# Altium PCB Board.PcbDoc
Units mil, origin at the board's own origin, x right, y up, seen from the top; angles counter-clockwise.
Board outline 2350 x 2400 mil, 2 copper layers (Top Layer, Bottom Layer); 48 components, 52 nets, 195 pads, 30 vias.
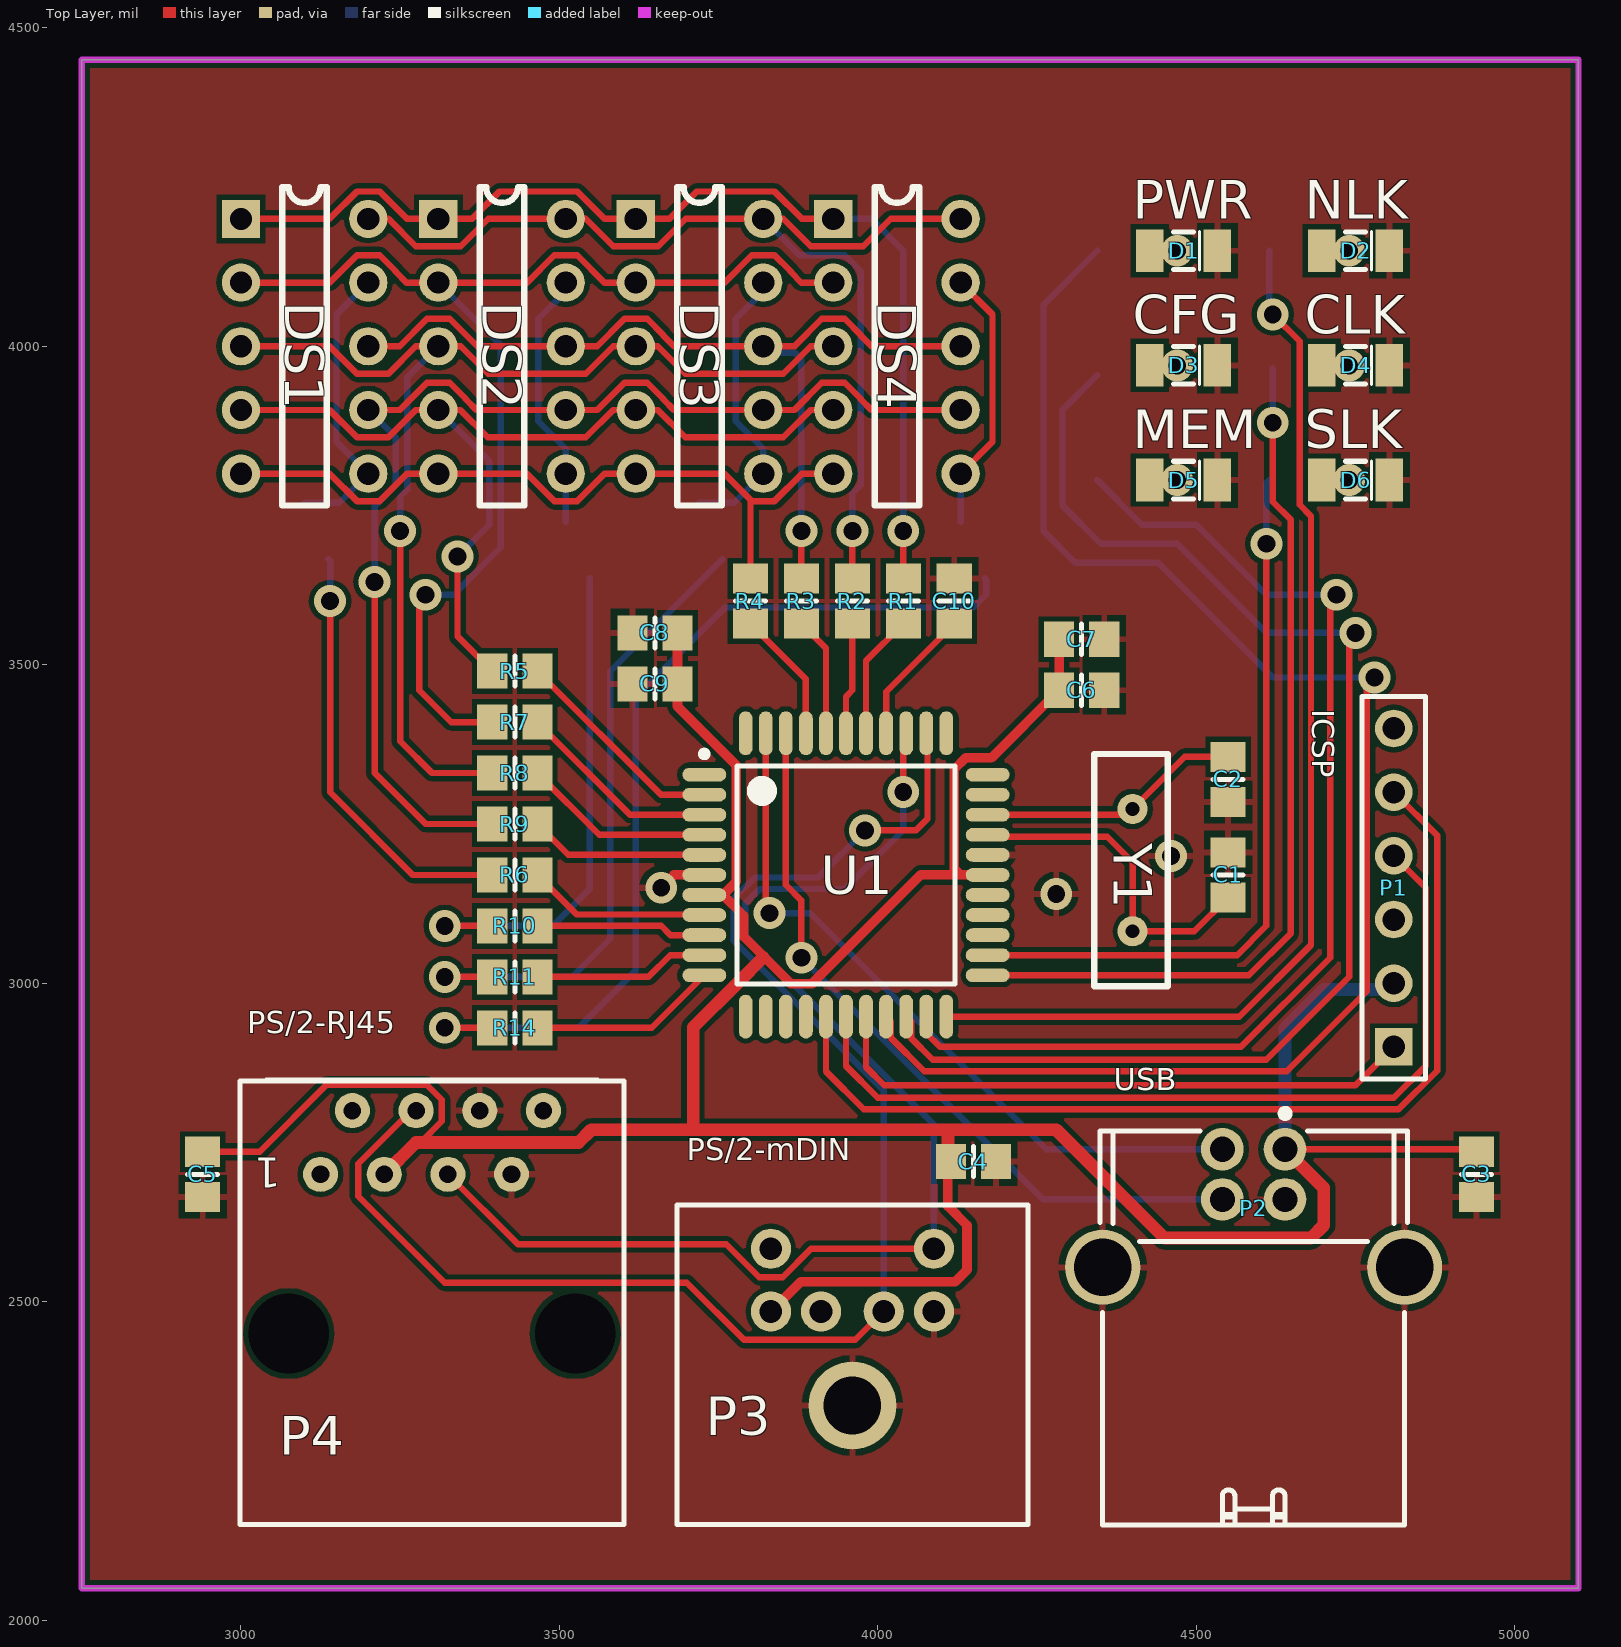
[diagram p0: Top Layer view]
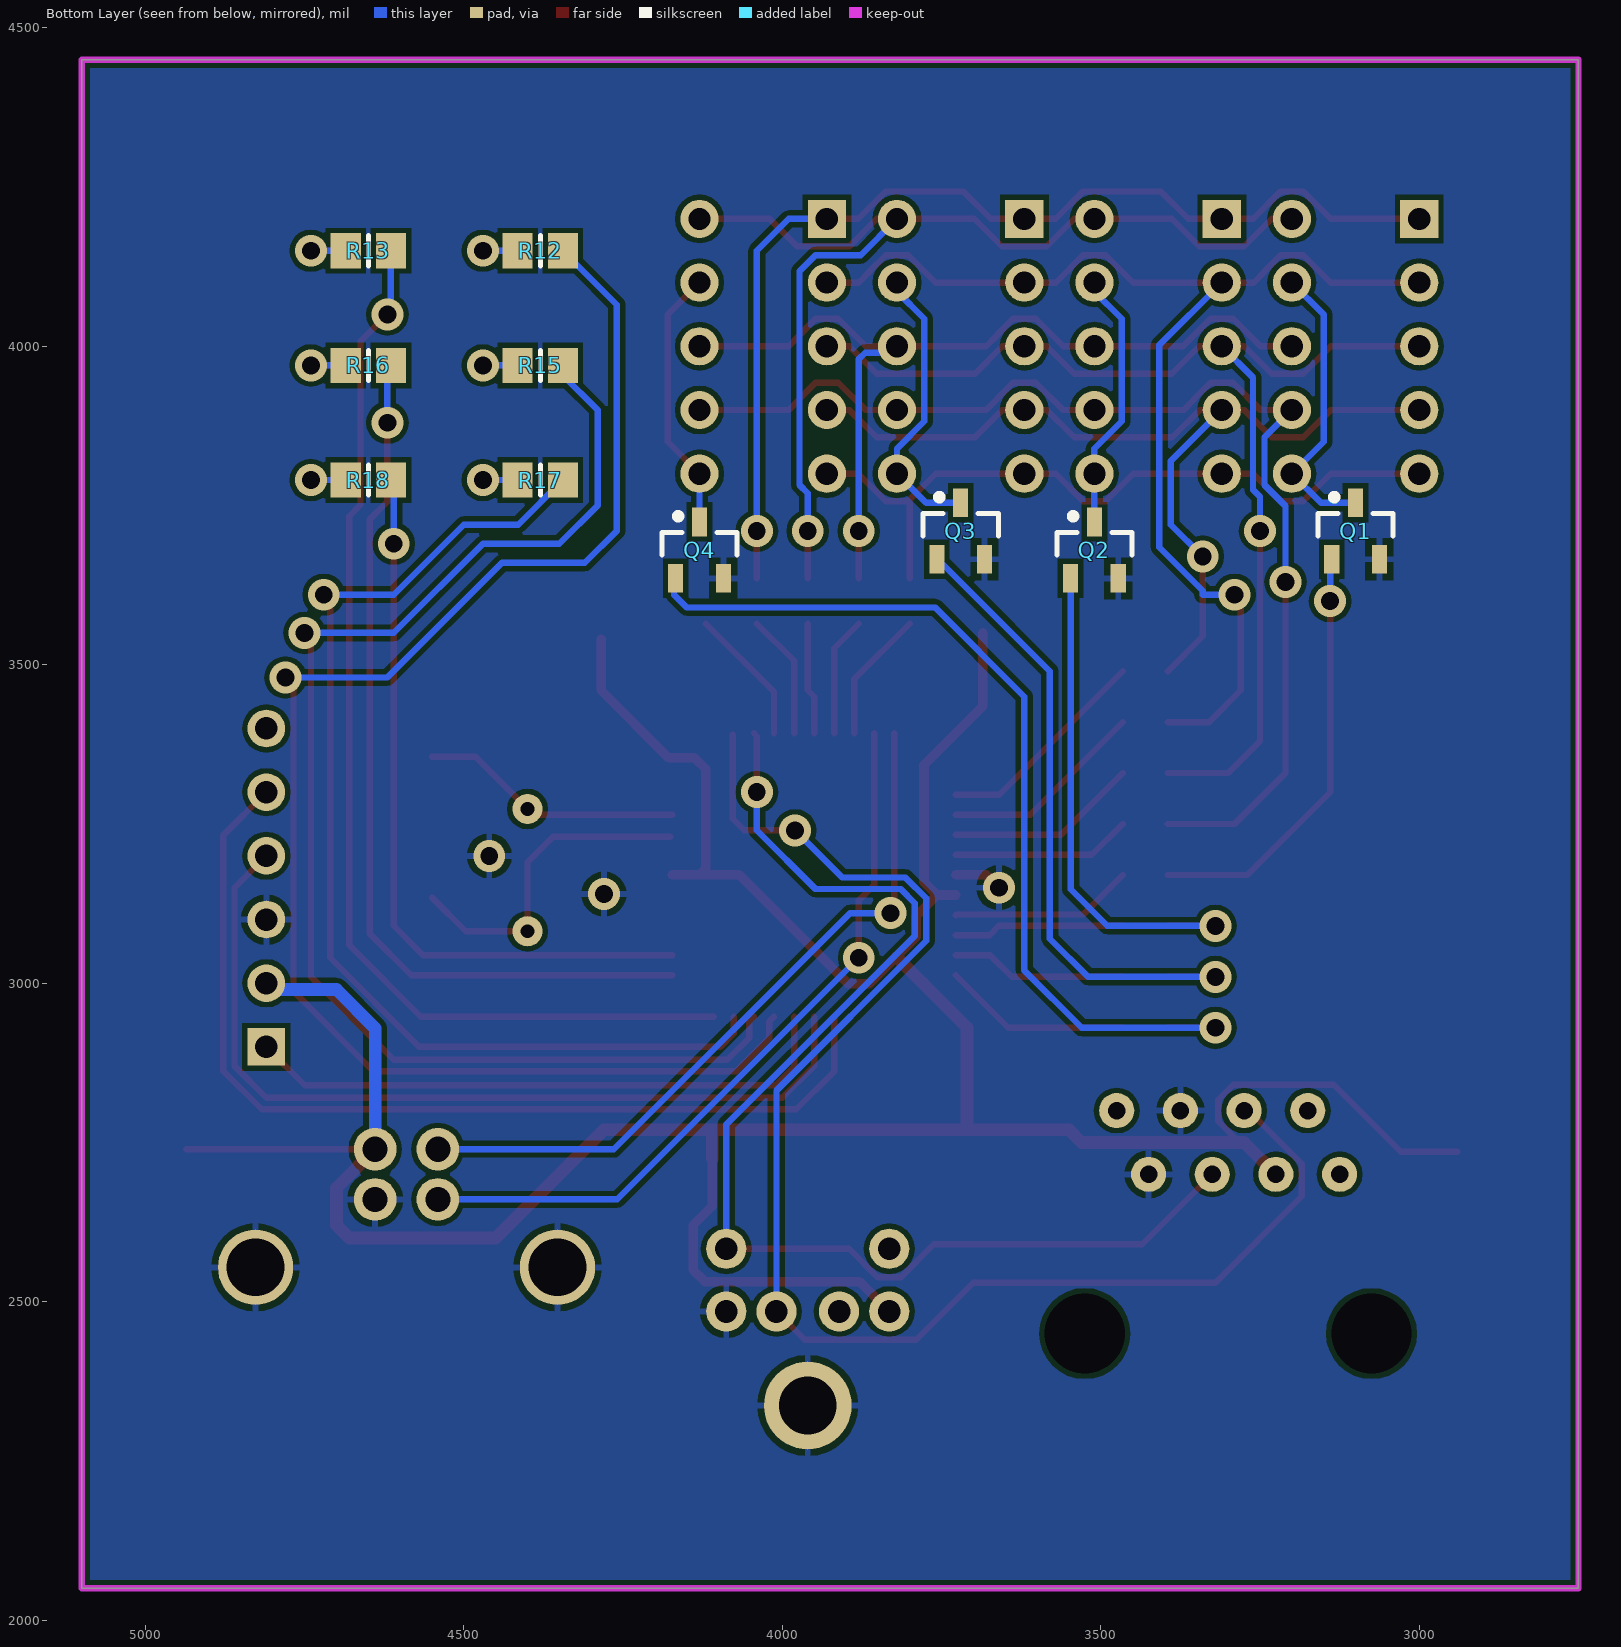
[diagram p1: Bottom Layer view, seen from below]

## Layer stack, top to bottom
Top Solder: solder mask 0.4, Solder Resist, Dk 3.5
Top Layer: signal copper 1.4
Dielectric 1: dielectric 12.6, FR-4, Dk 4.8
Bottom Layer: signal copper 1.4
Bottom Solder: solder mask 0.4, Solder Resist, Dk 3.5

## Board outline
2750,2050 2750,4450 5100,4450 5100,2050

## Design rules (kind name [scope] priority, off if disabled: settings)
Clearance [All] p1: gap=8
HoleSize [All] p1: absolutevalues=TRUE maxlimit=200 minlimit=1 maxpercent=80.000 minpercent=20.000
MinimumSolderMaskSliver [All] p1: minsoldermaskwidth=2
PolygonConnect [All] p1: connectstyle=Relief reliefconductorwidth=10 reliefentries=4 polygonreliefangle="90 Angle" airgapwidth=10
RoutingVias [All] p1: holewidth=28 width=50 viastyle="Through Hole" minholewidth=28 minwidth=50 maxholewidth=28 maxwidth=50
SilkToSilkClearance [All] p1: silktosilkclearance=0
SilkToSolderMaskClearance [IsPad] p1: minsilkscreentomaskgap=2 clearancetoexposedcopper=TRUE
SolderMaskExpansion [All] p1: expansion=3
Width [All] p1: maxlimit=20 minlimit=10 preferedwidth=10
25 further rules are at their usual default settings.

## Components (designator, comment, footprint, x,y, rotation, side; value= is the part's Value field where it differs from the comment)
C1 "CAP" 0805 4550,3170 r90 top
C2 "CAP" 0805 4550,3320 r270 top
C3 "CAP" 0805 4940,2700 r90 top
C4 "CAP" 0805 4150,2720 r180 top
C5 "CAP" 0805 2940,2700 r90 top
C6 "CAP" 0805 4320,3460 r180 top
C7 "CAP" 0805 4320,3540 r180 top
C8 "CAP" 0805 3650,3550 r0 top
C9 "CAP" 0805 3650,3470 r0 top
C10 "CAP" 0805 4120,3600 r270 top
D1 "PWR (BLU)" 1206P 4480,4150 r180 top
D2 "NUMLK (GRN)" 1206P 4750,4150 r180 top
D3 "CFG (YLW)" 1206P 4480,3970 r180 top
D4 "CAPSLK (GRN)" 1206P 4750,3970 r180 top
D5 "MEM (RED)" 1206P 4480,3790 r180 top
D6 "SCRLLK (GRN)" 1206P 4750,3790 r180 top
DS1 "DISPLAY 1" 7SEG 3000,4200 r0 top
DS2 "DISPLAY 2" 7SEG 3310,4200 r0 top
DS3 "DISPLAY 3" 7SEG 3620,4200 r0 top
DS4 "DISPLAY 4" 7SEG 3930,4200 r0 top
P1 "ICSP" HDR1X6 4810,2900 r90 top
P2 "USB" TYCO_292304-1 4590,2700 r0 top
P3 "PS/2 MiniDIN-6" PS2-6PIN 3960,2150 r180 top
P4 "PS/2 8P8C" FCI_54602-908LF 3300,2750 r180 top
Q1 "MMBT2222A" SOT-23 3100,3710 r90 bottom
Q2 "MMBT2222A" SOT-23 3510,3680 r90 bottom
Q3 "MMBT2222A" SOT-23 3720,3710 r90 bottom
Q4 "MMBT2222A" SOT-23 4130,3680 r90 bottom
R1 "RES" 0805 4040,3600 r90 top
R2 "RES" 0805 3960,3600 r90 top
R3 "RES" 0805 3880,3600 r90 top
R4 "RES" 0805 3800,3600 r90 top
R5 "RES" 0805 3430,3490 r180 top
R6 "RES" 0805 3430,3170 r180 top
R7 "RES" 0805 3430,3410 r180 top
R8 "RES" 0805 3430,3330 r180 top
R9 "RES" 0805 3430,3250 r180 top
R10 "RES" 0805 3430,3090 r180 top
R11 "RES" 0805 3430,3010 r180 top
R12 "RES" 0805 4380,4150 r0 bottom
R13 "RES" 0805 4650,4150 r0 bottom
R14 "RES" 0805 3430,2930 r180 top
R15 "RES" 0805 4380,3970 r0 bottom
R16 "RES" 0805 4650,3970 r0 bottom
R17 "RES" 0805 4380,3790 r0 bottom
R18 "RES" 0805 4650,3790 r0 bottom
U1 "PIC18F4550-I/PT" TQFP-PT44_N 3950,3170 r0 top
Y1 "XTAL" HC49 4400,3180 r270 top

## Footprints (in the part's own frame and the unit in brackets; to place one, negate y for a bottom-side part, rotate by r counter-clockwise, add the part's x,y. Pads: shape width x height; smd on the part's side, far side on the other; paste and mask are expansions set on the pad)
7SEG [mil]
  rect 60x60 hole 35: 1(0,0)
  round 60 hole 35: 2(0,-100) 3(0,-200) 4(0,-300) 5(0,-400) 6(200,-400) 7(200,-300) 8(200,-200) 9(200,-100) 10(200,0)
  silkscreen extent 65,-450 135,50, body extent -50,-450 249,50, height 297
0805 [mm] "0805 Component"
  rect 1.2x1.4 smd: 1(-0.9,0) 2(0.9,0)
  silkscreen extent 0,-0.6 0,0.6, body extent -1.07,-0.7 1.07,0.7, height 0.7
1206P [mm] "1206 Polar Component"
  rect 1.1x1.7 smd: 1(-1.35,0) 2(1.35,0)
  silkscreen extent -0.64,-0.76 0.4,0.76, body extent -1.7,-0.9 1.7,0.9, height 1.3
FCI_54602-908LF [mm] "1 Port, 8 Positions, CAT3 RJ45 Horizontal Modular Jack"
  round 1.4 hole 0.7: 1(4.445,1.27) 2(3.175,-1.27) 3(1.905,1.27) 4(0.635,-1.27) 5(-0.635,1.27) 6(-1.905,-1.27) 7(-3.171,1.27) 8(-4.445,-1.27)
  round 1 hole 3.2 unplated mask+1.1: M1(-5.715,7.62) M2(5.715,7.62)
  silkscreen extent -7.65,-2.5 7.65,15.24, body extent -7.65,-2.5 7.65,15.24, height 12.7
HC49 [mm] "HC49 Crystal"
  round 1.2 hole 0.555: 1(-2.38,0) 2(2.5,0)
  silkscreen extent -4.57,-1.52 4.7,1.4, body extent -4.95,-1.91 5.08,1.78, height 2.54
HDR1X6 [mm] "Connector; Header; 6 Position"
  rect 1.5x1.5 hole 0.9: 1(0,0)
  round 1.5 hole 0.9: 2(2.54,0) 3(5.08,0) 4(7.62,0) 5(10.16,0) 6(12.7,0)
  silkscreen extent -1.27,-1.27 13.97,1.27
PS2-6PIN [mm] "PS2 Socket, 6 Pin, Through Hole"
  round 1.6 hole 0.9: 1(-1.25,-8.5) 2(1.25,-8.5) 3(-3.25,-8.5) 4(3.25,-8.5) 5(-3.25,-11) 6(3.25,-11)
  round 3.5 hole 2.3: S(0,-4.75)
  silkscreen extent -7,-12.75 7,0
SOT-23 [mm] "SOT-23 Component"
  rect 1.15x0.6 smd: 1(-1.125,0.95) 2(1.125,0) 3(-1.125,-0.95)
  silkscreen extent -0.2,-1.5 1.47,1.5, body extent -0.7,-1.5 0.7,1.5, height 1.1
TQFP-PT44_N [mm] "Thin QFP, 44-Leads, Body 10x10mm, Pitch 0.8mm, IPC Medium Density"
  oval 1.75x0.55 smd: 1(-5.65,4) 2(-5.65,3.2) 3(-5.65,2.4) 4(-5.65,1.6) 5(-5.65,0.8) 6(-5.65,0) 7(-5.65,-0.8) 8(-5.65,-1.6) 9(-5.65,-2.4) 10(-5.65,-3.2) 11(-5.65,-4) 23(5.65,-4) 24(5.65,-3.2) 25(5.65,-2.4) 26(5.65,-1.6) 27(5.65,-0.8) 28(5.65,0) 29(5.65,0.8) 30(5.65,1.6) 31(5.65,2.4) 32(5.65,3.2) 33(5.65,4)
  oval 0.55x1.75 smd: 12(-4,-5.65) 13(-3.2,-5.65) 14(-2.4,-5.65) 15(-1.6,-5.65) 16(-0.8,-5.65) 17(0,-5.65) 18(0.8,-5.65) 19(1.6,-5.65) 20(2.4,-5.65) 21(3.2,-5.65) 22(4,-5.65) 34(4,5.65) 35(3.2,5.65) 36(2.4,5.65) 37(1.6,5.65) 38(0.8,5.65) 39(0,5.65) 40(-0.8,5.65) 41(-1.6,5.65) 42(-2.4,5.65) 43(-3.2,5.65) 44(-4,5.65)
  silkscreen extent -5.77,-4.35 4.35,4.95, body extent -5,-5 5,5, height 1.2
TYCO_292304-1 [mm] "Thru Hole, Right Angle, 4 Position, Type B, USB Receptacle"
  round 1.7 hole 1: 1(1.25,1) 2(-1.25,1) 3(-1.25,-1) 4(1.25,-1)
  round 3 hole 2.3: 5(-6.02,-3.71) 5(6.02,-3.71)
  silkscreen extent -6.13,-13.98 6.13,2.58, body extent -7.19,-13.98 7.19,1.72, height 11.5

## Part data
C1 C2 C3 C4 C5 C6 C7 C8 C9 C10: "Capacitor"
D1 D2 D3 D4 D5 D6: library part LED, "Light Emitting Diode"
DS1 DS2 DS3 DS4: library part 7SEG-CC, "7-segment Display Common Cathode"
P1: library part "Header 6", "Header, 6-Pin"
P2: library part TYCO_292304-1, "4 Pin + 1 Shield USB Receptacle"
P3: library part PS2-6PIN, "6 Pin Through Hole PS2 Socket (Kycon P/N)"
P4: library part FCI_54602-908LF, "1 Port, 8 Positions, CAT3 RJ45 Horizontal Modular Jack"
Q1 Q2 Q3 Q4: library part NPN, "Bipolar NPN Transistor"
R1 R2 R3 R4 R5 R6 R7 R8 R9 R10 R11 R12 R13 R14 R15 R16 R17 R18: "Resistor"
U1: "High Performance, Enhanced Flash, USB Microcontroller with nanoWatt Technology, 32K Flash, 44-Pin TQFP, Industrial Temperature Range"
Y1: "Crystal Oscillator"

## Via types
v1: diameter 50, hole 28, Top Layer to Bottom Layer, tented both sides, 24 vias
v2: diameter 50, hole 28, Top Layer to Bottom Layer, 6 vias

## Nets (pads, with @x,y where several pads share a name; then routed paths per layer and width w, separated by ;. In a path a pad name is that pad's centre, name@x,y a point inside that pad or via, vN(x,y) a via of type N, cw(c..) or ccw(c..) an arc to the next point about the centre after c; other vN are vias at no path point)
5V: C3.2 C4.2 C5.2 C6.2 C7.2 C8.2 C9.2 P1.2 P2.1 P3.4 P4.3 U1.7 U1.28 | length 5324.1
  Top Layer w10: C5.2 3029.31,2735.43 3134.44,2840.56 3291.8,2840.56 3315.56,2816.8 3315.56,2783.2 3282.36,2750 ; P2.1 C3.2@4936.06,2739.37
  Top Layer w15: C8.2 C9.2 3685.43,3434.57 3777.51,3342.49 3777.51,3159.1 3758.5,3140.09 3758.5,3138.5 U1.7@3756.92,3138.5 ; U1.7 U1.7@3756.92,3138.5 ; P3.4 3879.04,2531.64 4121.64,2531.64 4140,2550 4140,2620 4110,2650 C4.2@4110,2724.57 ; U1.28 4130,3170 ; C7.2 C6.2 4178.37,3353.81 4137.91,3353.81 4120,3335.89 4120,3200 4120,3180 4130,3170 ; U1.7@3756.92,3138.5 3789.5,3105.92 3789.5,3073.22 3863.22,2999.5 3896.78,2999.5 4067.28,3170 4130,3170
  Top Layer w20: P4.3 3275,2750 3282.36,2750 3530,2750 3550,2770 3710,2770 ; 3819.71,3040.29 3780.01,3000.58 3710,2930.57 3710,2770 ; C4.2@4110,2724.57 4110,2770 ; P2.1 4700,2678.58 4700,2620 4680,2600 4450,2600 4280,2770 4110,2770 ; 3710,2770 4110,2770
  Bottom Layer w20: P2.1 4639.21,2929.21 4700,2990 4800,2990 P1.2
DISP1_EN: R6.1 U1.8 | length 288.2
  Top Layer w10: R6.1 3527.43,3108 3726.57,3108 U1.8
DISP2_EN: R10.1 U1.9 | length 268.1
  Top Layer w10: R10.1 3660,3090 3674.49,3075.51 U1.9
DISP3_EN: R11.1 U1.10 | length 276.2
  Top Layer w10: R11.1 3640,3010 3674.02,3044.02 U1.10
DISP4_EN: R14.1 U1.11 | length 296.3
  Top Layer w10: R14.1 3645.04,2930 U1.11
DISP_A: R1.1 U1.38 | length 196.4
  Top Layer w10: U1.38 3981.5,3506.06 R1.1
DISP_B: R2.1 U1.39 | length 176.3
  Top Layer w10: U1.39 3950,3450 3960,3460 R2.1
DISP_C: R3.1 U1.40 | length 188.1
  Top Layer w10: R3.1 3918.5,3526.06 U1.40
DISP_D: R4.1 U1.41 | length 208.2
  Top Layer w10: R4.1 3887.01,3477.56 U1.41
DISP_DP: R9.1 U1.5 | length 282.2
  Top Layer w10: R9.1 3513.94,3201.5 U1.5
DISP_E: R5.1 U1.2 | length 342.5
  Top Layer w10: R5.1 3659.45,3295.98 U1.2
DISP_F: R7.1 U1.3 | length 322.4
  Top Layer w10: R7.1 3610.95,3264.49 U1.3
DISP_G: R8.1 U1.4 | length 302.3
  Top Layer w10: R8.1 3562.44,3232.99 U1.4
GND: C1.2 C2.2 C3.1 C4.1 C5.1 C6.1 C7.1 C8.1 C9.1 C10.1 D1.1 D2.1 D3.1 D4.1 D5.1 D6.1 P1.3 P2.4 P2.5 P3.3 P3.S P4.6 P4.7 Q1.3 Q2.3 Q3.3 Q4.3 U1.6 U1.29 | length 75.8
  Top Layer w15: v1(3660,3150) 3680,3170 U1.6
  other v1: 4280,3140 4460,3200
ICSP_PGC: P1.5 U1.16 | length 1560.9
  Top Layer w10: U1.16 3918.5,2861.5 3978,2802 4817.46,2802 4878,2862.54 4878,3232 P1.5
ICSP_PGD: P1.4 U1.17 | length 1379.7
  Top Layer w10: U1.17 3950,2870 4000,2820 4810,2820 4860,2870 4860,3150 P1.4
ICSP_VPP: P1.1 U1.18 | length 944.2
  Top Layer w10: U1.18 3981.5,2868.5 4010,2840 4750,2840 P1.1
LED_CAPSLK: R16.1 U1.23 | length 1400.8
  Top Layer w10: U1.23 4582.52,3012.52 4648,3078 4648,3728 4620,3756 v1(4620,3880)
  Bottom Layer w10: v1(4620,3880) R16.1@4620,3964.57
LED_CFG: R15.1 U1.20 | length 2112.5
  Top Layer w10: U1.20 4052.16,2939.89 4052.16,2914.07 4086.23,2880 4610,2880 4740,3010 4740,3550 v1(4750,3550)
  Bottom Layer w10: R15.1@4344.57,3954.57 4290,3900 4290,3750 4350,3690 4470,3690 4610,3550 v1(4750,3550)
LED_MEM: R17.1 U1.21 | length 1751
  Top Layer w10: U1.21 4075.98,2921.74 4097.72,2900 4570,2900 4710,3040 4710,3600 v1(4720,3610)
  Bottom Layer w10: R17.1 4414.57,3720 4500,3720 4610,3610 v1(4720,3610)
LED_NUMLK: R13.1 U1.22 | length 1736.2
  Top Layer w10: U1.22 4567.56,2947.56 4680,3060 4680,3733.35 4662.2,3751.15 4662.2,4007.8 v1(4620,4050)
  Bottom Layer w10: R13.1 4614.57,4055.43 v1(4620,4050)
LED_PWR: R12.1 U1.19 | length 2445
  Top Layer w10: U1.19 4020.66,2939.89 4020.66,2914.07 4072.73,2862 4642,2862 4767.47,2987.47 4767.47,3467.47 v1(4780,3480)
  Bottom Layer w10: R12.1 4260,4065.43 4260,3710 4310,3660 4440,3660 4620,3480 v1(4780,3480)
LED_SCRLLK: R18.1 U1.24 | length 1158.5
  Top Layer w10: U1.24 4564.02,3044.02 4610,3090 v1(4610,3690)
  Bottom Layer w10: v1(4610,3690) 4610,3785.43 R18.1
NetD1_A: D1.2 R12.2 | length 97.7
  Top Layer w10: D1.2 v2(4470,4150)
  Bottom Layer w10: R12.2 v2(4470,4150)
NetD2_A: D2.2 R13.2 | length 97.7
  Top Layer w10: D2.2 v2(4740,4150)
  Bottom Layer w10: R13.2 v2(4740,4150)
NetD3_A: D3.2 R15.2 | length 97.7
  Top Layer w10: D3.2 v2(4470,3970)
  Bottom Layer w10: R15.2 v2(4470,3970)
NetD4_A: D4.2 R16.2 | length 97.7
  Top Layer w10: D4.2 v2(4740,3970)
  Bottom Layer w10: R16.2 v2(4740,3970)
NetD5_A: D5.2 R17.2 | length 97.7
  Top Layer w10: D5.2 v2(4470,3790)
  Bottom Layer w10: R17.2 v2(4470,3790)
NetD6_A: D6.2 R18.2 | length 97.7
  Top Layer w10: D6.2 v2(4740,3790)
  Bottom Layer w10: R18.2 v2(4740,3790)
NetDS1_a: DS1.1 DS2.1 DS3.1 DS4.1 R1.2 | length 1682.1
  Top Layer w10: DS1.1 3139.19,4200 3182.19,4243 3217.81,4243 3260.81,4200 DS2.1 3362.93,4200 3405.93,4243 3527.81,4243 3570.81,4200 DS3.1 3672.93,4200 3715.93,4243 3837.81,4243 3880.81,4200 DS4.1 ; R1.2 v1(4040,3710)
  Bottom Layer w10: DS4.1 3990,4200 4040,4150 v1(4040,3710)
NetDS1_b: DS1.10 DS2.10 DS3.10 DS4.10 R2.2 | length 1711.7
  Top Layer w10: DS1.10 3231.62,4200 3274.62,4157 3345.38,4157 3388.38,4200 DS2.10 3541.62,4200 3584.62,4157 3655.38,4157 3698.38,4200 DS3.10 3851.62,4200 3894.62,4157 3977,4157 4020,4200 DS4.10 ; R2.2 v1(3960,3710)
  Bottom Layer w10: DS3.10 3877,4143 3947.81,4143 3973,4117.81 3973,3782.19 3960,3769.19 v1(3960,3710)
NetDS1_c: DS1.8 DS2.8 DS3.8 DS4.8 R3.2 | length 1436.5
  Top Layer w10: DS1.8 3249.19,4000 3292.19,4043 3327.81,4043 3370.81,4000 DS2.8 3559.19,4000 3602.19,4043 3637.81,4043 3663,4017.81 3663,4017 3680,4000 DS3.8 3869.19,4000 3912.19,4043 3947.81,4043 3973,4017.81 3973,4017 3990,4000 DS4.8 ; R3.2 v1(3880,3710)
  Bottom Layer w10: DS3.8@3830,3990 3870,3990 3880,3980 v1(3880,3710)
NetDS1_d: DS1.5 DS2.5 DS3.5 DS4.5 R4.2 | length 1159.3
  Top Layer w10: DS1.5 3139.19,3800 3182.19,3757 3217.81,3757 3260.81,3800 DS2.5 3449.19,3800 3492.19,3757 3527.81,3757 3570.81,3800 DS3.5 3759.19,3800 3802.19,3757 ; R4.2 3800,3754.81 3802.19,3757 ; DS4.5 3880.81,3800 3837.81,3757 3802.19,3757
NetDS1_DP: DS1.7 DS2.7 DS3.7 DS4.7 R9.2 | length 1857.5
  Top Layer w10: DS1.7 3249.19,3900 3292.19,3943 3327.81,3943 3353,3917.81 3353,3917 3370,3900 DS2.7 3559.19,3900 3602.19,3943 3637.81,3943 3663,3917.81 3663,3917 3680,3900 DS3.7 3869.19,3900 3912.19,3943 3947.81,3943 3973,3917.81 3973,3917 3990,3900 DS4.7 ; v1(3210,3630) 3210,3330 3290,3250 R9.2
  Bottom Layer w10: DS1.7 3243,3857 3243,3782.19 3210,3749.19 v1(3210,3630)
NetDS1_e: DS1.4 DS2.4 DS3.4 DS4.4 R5.2 | length 1537.3
  Top Layer w10: DS1.4 3139.19,3900 3182.19,3857 3231.64,3857 3274.64,3900 DS2.4 3344.54,3900 3387.54,3857 3541.64,3857 3584.64,3900 DS3.4 3654.54,3900 3697.54,3857 3851.64,3857 3894.64,3900 DS4.4 ; v1(3340,3670) 3340,3544.57 R5.2
  Bottom Layer w10: DS2.4@3310,3886 DS2.4 3390,3820 3390,3720 v1(3340,3670)
NetDS1_f: DS1.2 DS2.2 DS3.2 DS4.2 R7.2 | length 1936
  Top Layer w10: DS1.2 3139.19,4100 3182.19,4143 3217.81,4143 3243,4117.81 3243,4117 3260,4100 DS2.2 3449.19,4100 3492.19,4143 3527.81,4143 3570.81,4100 DS3.2 3759.19,4100 3802.19,4143 3837.81,4143 3863,4117.81 3863,4117 3880,4100 DS4.2 ; v1(3290,3610) 3280,3600 3280,3460 3330,3410 R7.2
  Bottom Layer w10: v1(3290,3610) 3340,3610 3340,3616.26 3408,3684.26 3408,4002 DS2.2
NetDS1_g: DS1.3 DS2.3 DS3.3 DS4.3 R8.2 | length 1847
  Top Layer w10: DS1.3 3139.19,4000 3182.19,3957 3231.64,3957 3274.64,4000 DS2.3 3345.36,4000 3388.36,3957 3541.64,3957 3584.64,4000 DS3.3 3654.54,4000 3697.54,3957 3851.64,3957 3894.64,4000 DS4.3 ; v1(3250,3710) 3250,3380 3300,3330 R8.2
  Bottom Layer w10: v1(3250,3710) 3250,3763.73 3261,3774.73 3261,3951 DS2.3
NetDS1_K1: DS1.6 DS1.9 Q1.2 | length 460.4
  Bottom Layer w10: Q1.2 3154.29,3754.29 DS1.6 3150,3850 3150,4050 DS1.9
NetDS2_K1: DS2.6 DS2.9 Q2.2 | length 411.3
  Bottom Layer w10: Q2.2 DS2.6 3510,3839.19 3467,3882.19 3467,4043 3510,4086 DS2.9
NetDS3_K1: DS3.6 DS3.9 Q3.2 | length 454.6
  Bottom Layer w10: Q3.2 3774.29,3754.29 DS3.6 3820,3839.19 3777,3882.19 3777,4043 3820,4086 DS3.9
NetDS4_K1: DS4.6 DS4.9 Q4.2 | length 417.1
  Top Layer w10: DS4.6 4180,3850 4180,4050 DS4.9
  Bottom Layer w10: Q4.2 DS4.6
NetQ1_B: Q1.1 R6.2 | length 675.2
  Top Layer w10: v1(3140,3600) 3140,3300 3270,3170 R6.2
  Bottom Layer w10: Q1.1 3140,3663.11 v1(3140,3600)
NetQ2_B: Q2.1 R10.2 | length 814.1
  Top Layer w10: v1(3320,3090) R10.2
  Bottom Layer w10: v1(3320,3090) 3490,3090 3547.4,3147.4 Q2.1
NetQ3_B: Q3.1 R11.2 | length 1027.9
  Top Layer w10: v1(3320,3010) R11.2
  Bottom Layer w10: v1(3320,3010) 3520,3010 3580,3070 3580,3490 Q3.1@3755.71,3665.71
NetQ4_B: Q4.1 R14.2 | length 1484.9
  Top Layer w10: v1(3320,2930) R14.2
  Bottom Layer w10: v1(3320,2930) 3530,2930 3620,3020 3620,3450 3760,3590 4150,3590 4170,3610 4170,3633.11 Q4.1
PS2_CLK: P3.5 P4.5 U1.36 | length 1963.1
  Top Layer w10: P4.5 3435,2590 3762.19,2590 3813.62,2538.57 3850.48,2538.57 3894.97,2583.07 P3.5 ; v1(4040,3300) 4040,3387.95 U1.36
  Bottom Layer w10: v1(4040,3300) 4040,3240 3948,3148 3814.26,3148 3792,3125.74 3792,3074.26 4087.95,2778.31 P3.5
PS2_DATA: P3.1 P4.4 U1.35 | length 2346.9
  Top Layer w10: P4.4 3267.64,2800 3184.44,2716.8 3184.44,2665.56 3320,2530 3700,2530 3789.85,2440.15 3964.72,2440.15 P3.1 ; v1(3980,3240) 4060,3240 4078,3258 U1.35@4078,3390.43
  Bottom Layer w10: v1(3980,3240) 3906,3166 3806.8,3166 3774,3133.2 3774,3066.8 4009.21,2831.59 P3.1
USB_DM: P2.3 U1.42 | length 1180.5
  Top Layer w10: U1.42 3855.51,3154.49 3880,3130 v1(3880,3040)
  Bottom Layer w10: v1(3880,3040) 4259.37,2660.63 P2.3
USB_DP: P2.2 U1.43 | length 1149.2
  Top Layer w10: U1.43 3824.02,3115.98 v1(3830,3110)
  Bottom Layer w10: v1(3830,3110) 3893.74,3110 4264.37,2739.37 P2.2
VUSB: C10.2 U1.37 | length 216.4
  Top Layer w10: U1.37 4012.99,3457.56 C10.2
XTAL_OSC1: C1.1 U1.30 Y1.2 | length 521.5
  Top Layer w10: U1.30@4175.43,3230 4360,3230 4400,3190 Y1.2 4497.01,3081.57 C1.1
XTAL_OSC2: C2.1 U1.31 Y1.1 | length 415.2
  Top Layer w10: U1.31 4390.79,3264.49 Y1.1 4481.73,3355.43 C2.1
pads on no net: P1.6 P3.2 P3.6 P4.1 P4.2 P4.8 P4.M1 P4.M2 U1.1 U1.12 U1.13 U1.14 U1.15 U1.25 U1.26 U1.27 U1.32 U1.33 U1.34 U1.44

## Polygon pours and split planes (outlines as drawn)
GND on Bottom Layer "Bottom Layer-GND" (solid, pour order 3): 2750,2050 2750,4450 5100,4450 5100,2050
GND on Top Layer "Top Layer-GND" (solid, pour order 6): 2750,2050 2750,4450 5100,4450 5100,2050

## Keep-outs
Keep-Out Layer:
  the board outline again, w10

## Silkscreen, mask and mechanical layers (free items; w line width, h text height)
Top Overlay:
  text "PWR" at 4400,4200 h60
  text "NLK" at 4670,4200 h60
  text "CFG" at 4400,4020 h60
  text "CLK" at 4670,4020 h60
  text "MEM" at 4400,3840 h60
  text "SLK" at 4670,3840 h60
  text "ICSP" at 4670,3430 h60 r270
  text "PS/2-RJ45" at 3010,2910 h60
  text "USB" at 4370,2820 h60
  text "PS/2-mDIN" at 3700,2710 h60
Mechanical 15:
  lines w5: 2850,2100 5000,2100 5000,4350 2850,4350 2850,2100
  text "TOP MOUNTING SLOT REGION" at 3290,4370 h60
  text "RIGHT MOUNTING SLOT REGION" at 5020,3910 h60 r270
  text "LEFT MOUNTING SLOT REGION" at 2830,2385 h60 r90

## Text inside footprints (layer, text, board x,y; h text height)
P4: Top Overlay "1" at 3062.6,2726.38 h47.24 r180; Mechanical 14 "1" at 3062.6,2726.38 h47.24 r180